# Altium PCB BugBuster_DAQ.PcbDoc (part 2 of 5)
Units mm, origin at the board's own origin, x right, y up, seen from the top; angles counter-clockwise.
Board outline 110 x 80 mm, 6 copper layers (Top Layer, Inner Layer 1, Inner Layer 2, Inner Layer 3, Inner Layer 4, Bottom Layer), stack 1.202 mm thick; 245 components, 205 nets, 1250 pads, 1565 vias.
Unrouted connection lines stored in the file: 8.
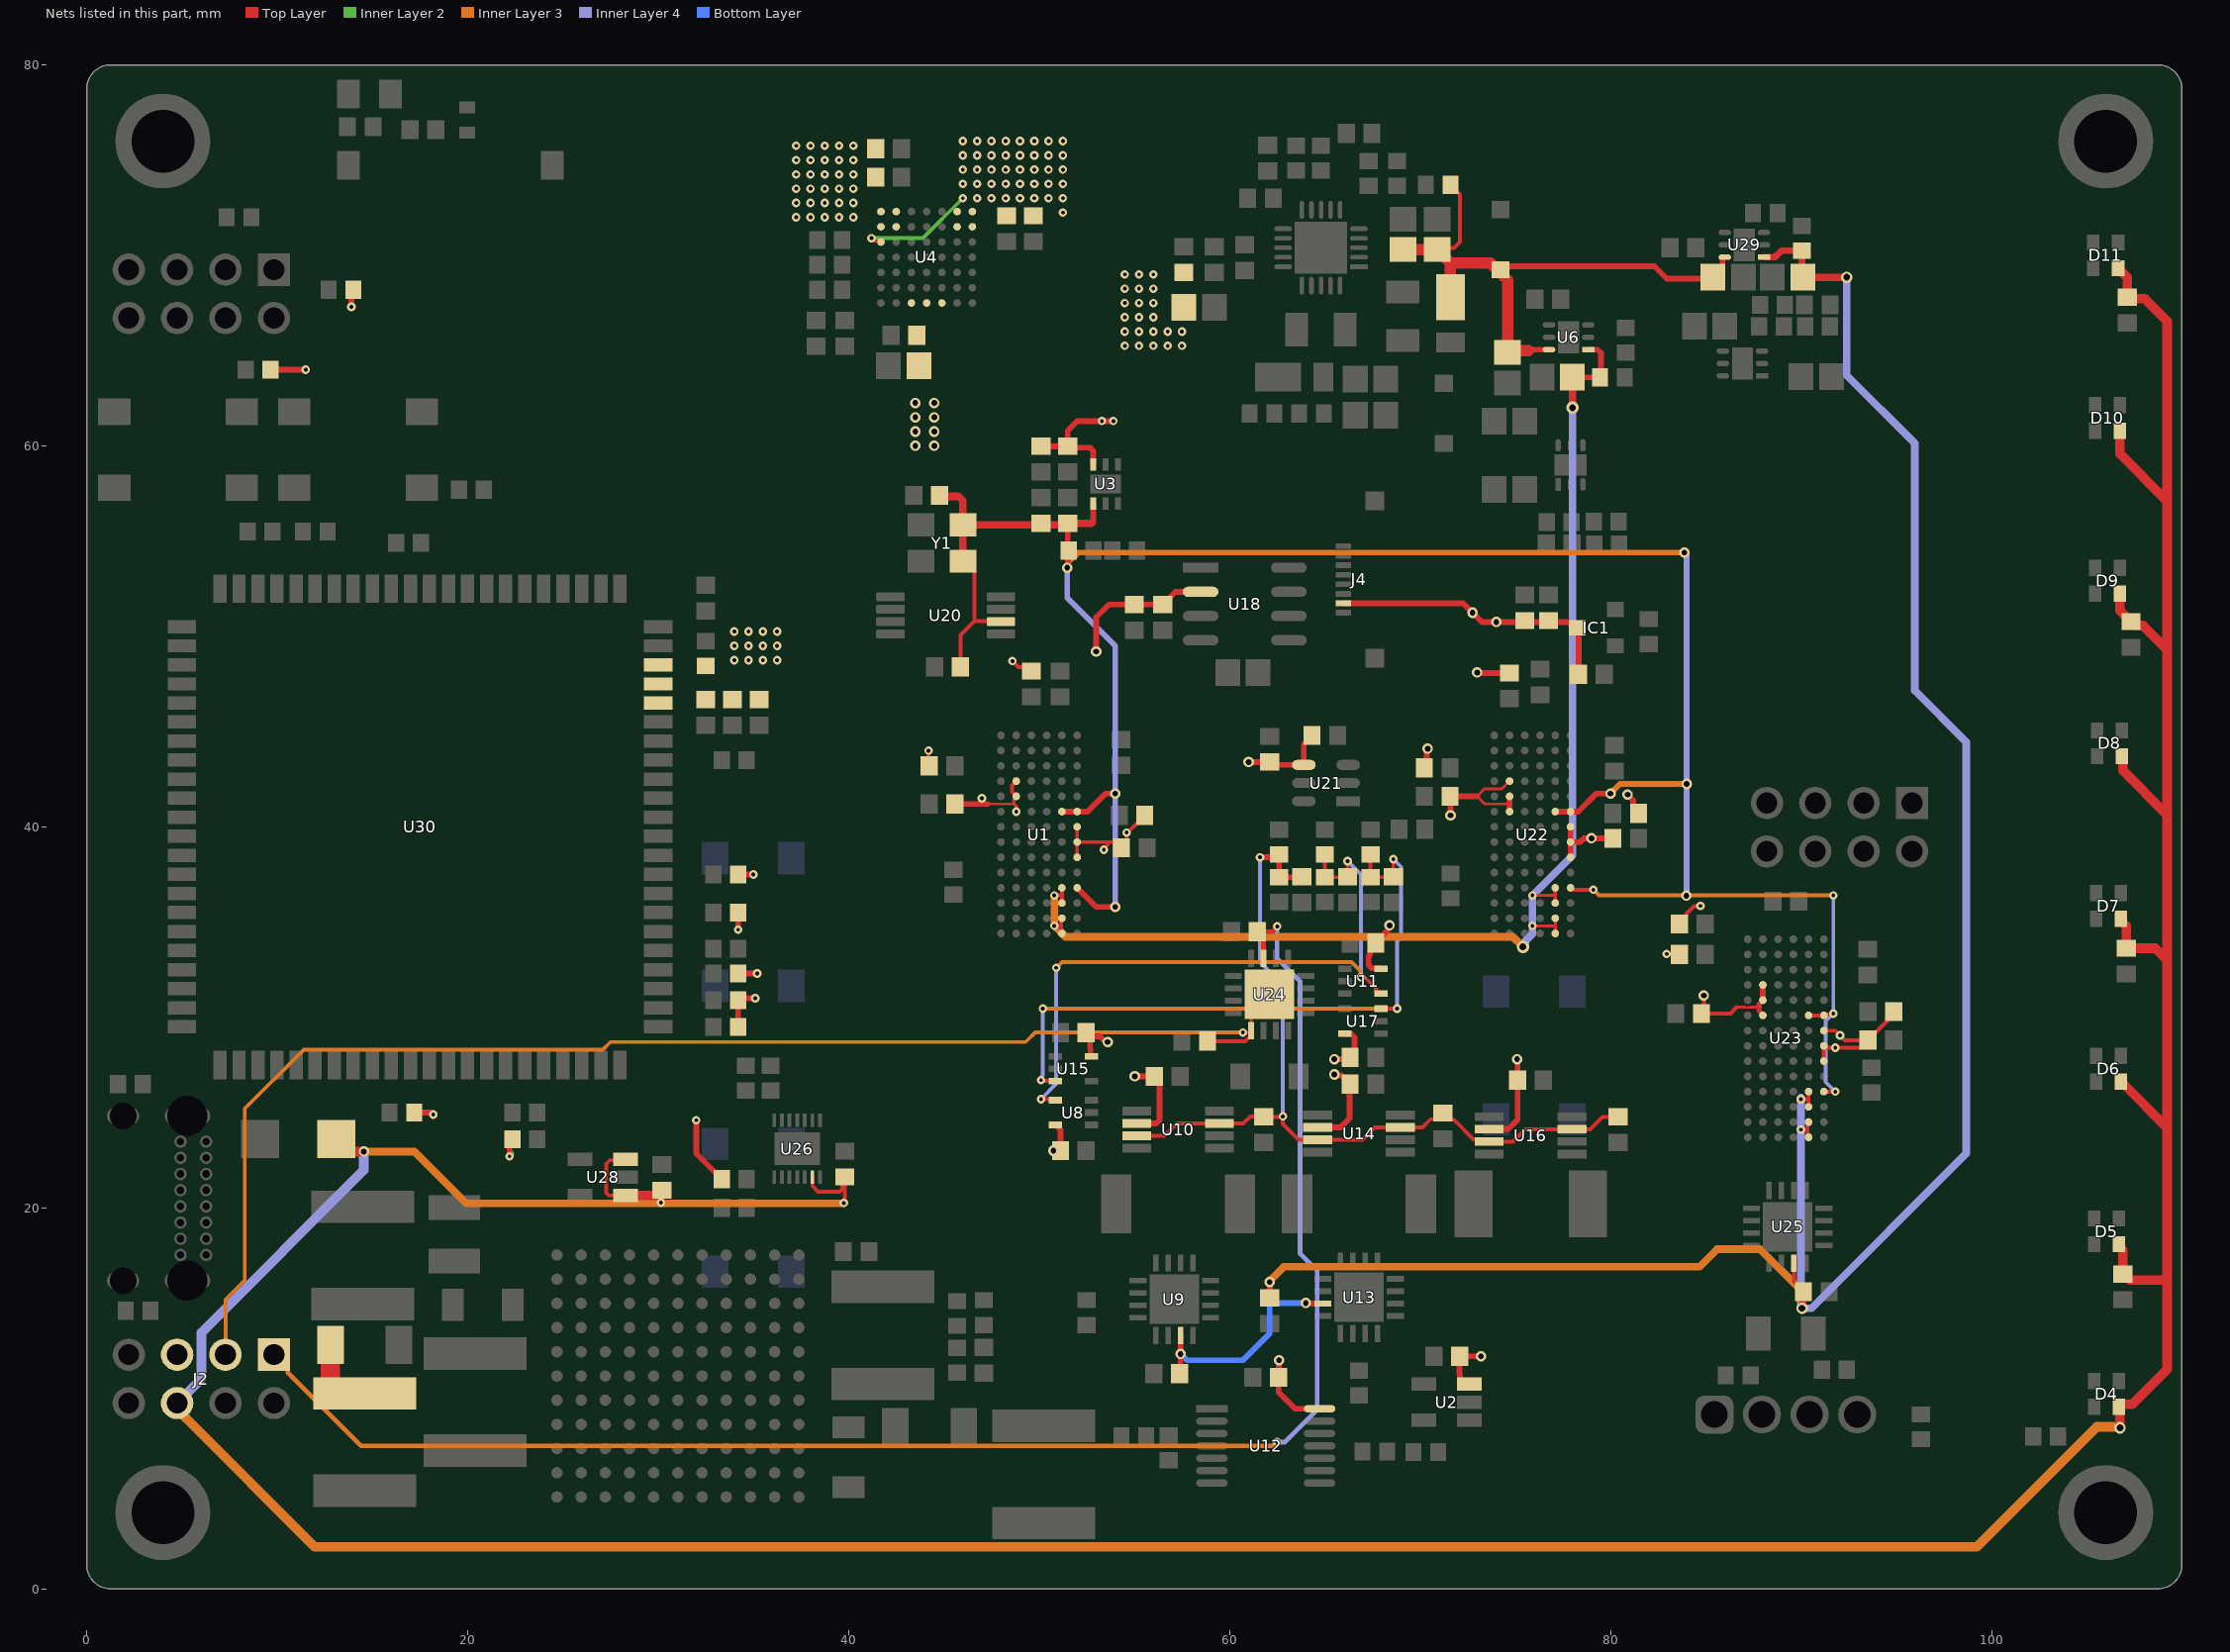
[diagram p6: the nets of this part, all layers, seen from the top]

## Part data (continued)
C47 C94: library part GCJ188R71E102KA01D, "CAP CER 1000PF 25V X7R 0603", Device Package="0603 (1608 Metric)", manufacturer="Murata Electronics", Operating Temperature="-55°C ~ 125°C", Ratings=AEC-Q200, Supplier Part Number 1=490-16478-1-ND, Temperature Coefficient=X7R, Tolerance=±10%, Voltage - Rated=25V, Applications="Automotive Boardflex Sensitive", Capacitance="1000 pF", componentlink1description=Datasheet, componentlink1url=https://search.murata.co.jp/Ceramy/image/img/A01X/G101/ENG/GCJ188R71E102KA01-01.pdf, componentlink2description="DigiKey Link", componentlink2url=https://www.digikey.com/en/products/detail/murata-electronics/GCJ188R71E102KA01D/7363222, Features="Soft Termination", lastupdated="2026-04-06 19:23:52.667000", Lifecycle Status=Active, Minimum Order=1, Mounting Type="Surface Mount MLCC", Package / Case="0603 (1608 Metric)", packaging=TapeAndReel, Part Number=GCJ188R71E102KA01D, Part Status=Active, partid=2177, price=0.01, series=GCJ, Size / Dimension="0.063\ L x 0.031\ W (1.60mm x 0.80mm)", Supplier 1=DigiKey, Thickness (Max)="0.035\ (0.90mm)"
C65 C66 C67 C69 C70: library part CGA9P3X7R1H226M250KB, "CAP 2220 X7R 50V 22UF 20% 2.50MM", Device Package="2220 (5750 Metric)", manufacturer="TDK Corporation", Operating Temperature="-55°C ~ 125°C", Ratings=AEC-Q200, Supplier Part Number 1=445-181650-1-ND, Temperature Coefficient=X7R, Tolerance=±20%, Voltage - Rated=50V, Applications=Automotive, Capacitance=22µF, componentlink1description=Datasheet, componentlink1url=https://product.tdk.com/info/en/catalog/datasheets/mlcc_automotive_general_en.pdf?ref_disty=digikey, componentlink2description="DigiKey Link", componentlink2url=http://digikey.com/product-detail/en/tdk-corporation/CGA9P3X7R1H226M250KB/445-181650-1-ND/10240637, Features="Low ESL", lastupdated="2020-09-02 01:11:23.223000", Lifecycle Status=Active, Minimum Order=1, Mounting Type="Surface Mount MLCC", Package / Case="2220 (5750 Metric)", packaging=TapeAndReel, Part Number=CGA9P3X7R1H226M250KB, Part Status=Active, price=5.78, series=CGA, Size / Dimension="0.224\ L x 0.197\ W (5.70mm x 5.00mm)", Supplier 1=DigiKey, Thickness (Max)="0.110\ (2.80mm)"
C68: library part 1210B106K500CT, "CAP CER 10UF 50V X7R 1210", Device Package="1210 (3225 Metric)", manufacturer="Walsin Technology Corporation", Operating Temperature="-55°C ~ 125°C", Supplier Part Number 1=1292-1210B106K500CT-ND, Temperature Coefficient=X7R, Tolerance=±10%, Voltage - Rated=50V, Applications="General Purpose", Capacitance="10 µF", componentlink1description=Datasheet, componentlink1url=https://www.passivecomponent.com/wp-content/uploads/datasheet/WTC_MLCC_General_Purpose.pdf, componentlink2description="DigiKey Link", componentlink2url=https://www.digikey.com/en/products/detail/walsin-technology-corporation/1210B106K500CT/15987744, lastupdated="2026-04-06 19:45:06.543000", Lifecycle Status=Active, Minimum Order=1, Mounting Type="Surface Mount MLCC", Package / Case="1210 (3225 Metric)", packaging=TapeAndReel, Part Number=1210B106K500CT, partid=78364, price=0.07, series=-, Size / Dimension="0.126\ L x 0.098\ W (3.20mm x 2.50mm)", Supplier 1=DigiKey, Thickness (Max)="0.110\ (2.80mm)"
C71: library part CC0603KRNPO9BN470, "CAP CER 47PF 50V C0G/NPO 0603", Device Package="0603 (1608 Metric)", manufacturer=Yageo, Operating Temperature="-55°C ~ 125°C", Supplier Part Number 1=311-4037-1-ND, Temperature Coefficient="C0G NP0", Tolerance=±10%, Voltage - Rated=50V, Applications="General Purpose", Capacitance="47 pF", componentlink1description=Datasheet, componentlink1url=https://www.yageo.com/upload/media/product/productsearch/datasheet/mlcc/UPY-GP_NP0_16V-to-50V_17.pdf, componentlink2description="DigiKey Link", componentlink2url=https://www.digikey.com/en/products/detail/yageo/CC0603KRNPO9BN470/5883714, lastupdated="2026-04-06 19:23:26.303000", Lifecycle Status=Active, Minimum Order=1, Mounting Type="Surface Mount MLCC", Package / Case="0603 (1608 Metric)", packaging=TapeAndReel, Part Number=CC0603KRNPO9BN470, Part Status=Active, partid=9442, price=0.01, series=CC, Size / Dimension="0.063\ L x 0.031\ W (1.60mm x 0.80mm)", Supplier 1=DigiKey, Thickness (Max)="0.035\ (0.90mm)"
C73: library part GRM21BZ7YA475KE15K, "CAP CER 4.7UF 35V X7R 0805", Device Package="0805 (2012 Metric)", manufacturer="Murata Electronics", Operating Temperature="-55°C ~ 125°C", Supplier Part Number 1=490-GRM21BZ7YA475KE15KCT-ND, Temperature Coefficient=X7R, Tolerance=±10%, Voltage - Rated=35V, Applications="General Purpose", Capacitance="4.7 µF", componentlink1description=Datasheet, componentlink1url=https://search.murata.co.jp/Ceramy/image/img/A01X/G101/ENG/GRM21BZ7YA475KE15-01.pdf, componentlink2description="DigiKey Link", componentlink2url=https://www.digikey.com/en/products/detail/murata-electronics/GRM21BZ7YA475KE15K/13904872, lastupdated="2026-04-06 19:31:47.907000", Lifecycle Status=Active, Minimum Order=1, Mounting Type="Surface Mount MLCC", Package / Case="0805 (2012 Metric)", packaging=TapeAndReel, Part Number=GRM21BZ7YA475KE15K, Part Status=Active, partid=42428, price=0.05, series=GRM, Size / Dimension="0.079\ L x 0.049\ W (2.00mm x 1.25mm)", Supplier 1=DigiKey, Thickness (Max)="0.057\ (1.45mm)"
C77 C78: library part AC0603KRX7R0BB103, "CAP CER 10000PF 100V X7R 0603", Device Package="0603 (1608 Metric)", manufacturer=Yageo, Operating Temperature="-55°C ~ 125°C", Ratings=AEC-Q200, Supplier Part Number 1=311-3100-1-ND, Temperature Coefficient=X7R, Tolerance=±10%, Voltage - Rated=100V, Applications=Automotive, Capacitance="10000 pF", componentlink1description=Datasheet, componentlink1url=http://www.yageo.com/NewPortal/_en/search/productDocs.jsp?YageoPartNumber=AC0603KRX7R0BB103, componentlink2description="DigiKey Link", componentlink2url=https://www.digikey.com/en/products/detail/yageo/AC0603KRX7R0BB103/6643086, lastupdated="2026-04-06 19:23:52.473000", Lifecycle Status=Active, Minimum Order=1, Mounting Type="Surface Mount MLCC", Package / Case="0603 (1608 Metric)", packaging=TapeAndReel, Part Number=AC0603KRX7R0BB103, Part Status=Active, partid=2218, price=0.01, series=AC, Size / Dimension="0.063\ L x 0.031\ W (1.60mm x 0.80mm)", Supplier 1=DigiKey, Thickness (Max)="0.035\ (0.90mm)"
C85: library part 06035C4R7KAT2A, "SMT Capacitor", Device Package="0603 (1608 Metric)", manufacturer="KYOCERA AVX", Operating Temperature="-55°C ~ 125°C", Supplier Part Number 1=478-06035C4R7KAT2ACT-ND, Temperature Coefficient=X7R, Tolerance=±10%, Voltage - Rated=50V, Applications="General Purpose", Capacitance="4.7 pF", componentlink2description="DigiKey Link", componentlink2url=https://www.digikey.com/en/products/detail/kyocera-avx/06035C4R7KAT2A/11259106, lastupdated="06/04/2026 19:18:45", Lifecycle Status=Active, Minimum Order=1, Mounting Type="Surface Mount, MLCC", Package / Case="0603 (1608 Metric)", packaging=TapeAndReel, Part Number=06035C4R7KAT2A, partid=68839, price=0.03, series=-, Size / Dimension="0.063\" L x 0.032\" W (1.60mm x 0.81mm)", Supplier 1=DigiKey, Thickness (Max)="0.035\" (0.90mm)"
C86: library part C0603C279D5GAC7867, "SMT Capacitor", Device Package="0603 (1608 Metric)", manufacturer=KEMET, Operating Temperature="-55°C ~ 125°C", Supplier Part Number 1=399-C0603C279D5GAC7867CT-ND, Temperature Coefficient="C0G, NP0", Tolerance=±0.5pF, Voltage - Rated=50V, Applications="General Purpose", Capacitance="2.7 pF", componentlink1description=Datasheet, componentlink1url=https://api.kemet.com/component-edge/download/datasheet/C0603C279D5GACTU.pdf, componentlink2description="DigiKey Link", componentlink2url=https://www.digikey.com/en/products/detail/kemet/C0603C279D5GAC7867/2200451, Features="Low ESL", lastupdated="06/04/2026 19:22:23", Lifecycle Status=Active, Minimum Order=1, Mounting Type="Surface Mount, MLCC", Package / Case="0603 (1608 Metric)", packaging=TapeAndReel, Part Number=C0603C279D5GAC7867, Part Status=Active, partid=34968, price=0.04, series="SMD Comm C0G", Size / Dimension="0.063\" L x 0.031\" W (1.60mm x 0.80mm)", Supplier 1=DigiKey, Thickness (Max)="0.034\" (0.87mm)"
CR1: "DIODE STANDARD 1000V 1A SOD123F", Manufacturer_Name="Diodes Inc", Copyright="Copyright (C) 2026 Ultra Librarian. All rights reserved.", Manufacturer_Part_Number=RS1MWF-7
D1 D2: library part CMP-12790-000037-1, "DIODE SCHOTTKY 40V 2A POWERDI123", Capacitance=28pF, Forward Current=2A, manufacturer="Diodes Inc.", Max Junction Temp=+125°C, Max Repetitive Reverse Voltage=40V, Max Surge Forward Current=40A, Package=PowerDI123, Peak Reverse Current=20uA, Temperature="-65°C to +125°C", Temperature Range Low=-65°C, Automotive=No, Category=Diode, componentlink2description=Datasheet, componentlink2url=https://www.diodes.com/assets/Package-Files/PowerDI123.pdf, Device Class L1="Discrete Semiconductors", Device Class L2=Diodes, Device Class L3="Schottky Diodes", Digikey Description="DIODE SCHOTTKY 40V 2A POWERDI123", Footprint Url=https://www.diodes.com/assets/Package-Files/PowerDI123.pdf, Height=1mm, Lead Free=Yes, Manufacturer Part Number=DFLS240-7, Mouser Description="Schottky Diodes & Rectifiers 2.0A 40V", Octopart=https://octopart.com/dfls240-7-diodes+inc.-9289682, Reverse Voltage=40V, RoHS=TRUE, Temperature Range High=+125°C
D3: library part CMP-1055-00307-2, "DIODE SCHOTTKY 40V 3A SMA", Average Rectified Current=3A, Case/Package=SMA, Forward Voltage=450mV, Max Forward Surge Current (Ifsm)=100A, Max Operating Temperature=150°C, Max Repetitive Reverse Voltage (Vrrm)=40V, Max Reverse Current=15mA, Min Operating Temperature=-55°C, Package Quantity=5000, Element Configuration=Single, Forward Current=3A, Halogen Free="Halogen Free", Height=2.05mm, Lead Free="Lead Free", Length=4.57mm, Max Reverse Voltage (DC)=40V, Number of Pins=2, packaging="Tape and Reel", Peak Non-Repetitive Surge Current=100A, Radiation Hardening=No, REACH SVHC="No SVHC", RoHS Compliant=Yes, series=-, Weight=0.003739oz, Width=2.92mm
D4 D5 D6 D7 D8 D9 D10 D11: "2020 RGB LED(BUILT-IN IC)", Package=None, Check_prices=https://www.snapeda.com/parts/XL-2020RGBC-WS2812B/Xinglight/view-part/?ref=eda, MF=XINGLIGHT, MP=XL-2020RGBC-WS2812B, SnapEDA_Link=https://www.snapeda.com/parts/XL-2020RGBC-WS2812B/Xinglight/view-part/?ref=snap
D12 D13: "DIODE ZENER 27V 500MW SOD123", Current - Reverse Leakage @ Vr="100 nA @ 18.9 V", manufacturer="Diodes Incorporated", Operating Temperature="-65°C ~ 150°C", Package / Case=SOD-123, Power - Max="500 mW", Supplier Part Number 1=BZT52C27-FDICT-ND, Tolerance=±7%, Voltage - Forward (Vf) (Max) @ If="900 mV @ 10 mA", Voltage - Zener (Nom) (Vz)="27 V", componentlink1description=Datasheet, componentlink1url=https://www.diodes.com/assets/Datasheets/ds18004.pdf, componentlink2description="DigiKey Link", componentlink2url=https://www.digikey.com/en/products/detail/diodes-incorporated/BZT52C27-7-F/815014, Impedance (Max) (Zzt)="80 Ohms", lastupdated="05/04/2026 20:32:36", Lifecycle Status=Active, Minimum Order=1, Mounting Type="Surface Mount", packaging=TapeAndReel, Part Number=BZT52C27-7-F, Part Status=Active, partid=1914, price=0.02, series=-, Supplier 1=DigiKey, Supplier Device Package=SOD-123
DNP R2 R3 R4 R20 R22 R41 R51 R65 R67: library part ERJ-PA3F1003V, "RES SMD 100K OHM 1% 1/3W 0603", Device Package="0603 (1608 Metric)", manufacturer="Panasonic Electronic Components", Operating Temperature="-55Â°C ~ 155Â°C", Power (Watts)="0.333W 1/3W", Ratings=AEC-Q200, Supplier Device Package=0603, Supplier Part Number 1=P100KBYCT-ND, Temperature Coefficient=Â±100ppm/Â°C, Tolerance=Â±1%, componentlink1description=Datasheet, componentlink1url=https://industrial.panasonic.com/cdbs/www-data/pdf/RDO0000/AOA0000C331.pdf, componentlink2description="DigiKey Link", componentlink2url=https://www.digikey.com/en/products/detail/panasonic-electronic-components/ERJ-PA3F1003V/5035850, Composition="Thick Film", Features="Automotive AEC-Q200 Pulse Withstanding", Height - Seated (Max)="0.022\ (0.55mm)", lastupdated="2024-02-09 20:42:57.243000", Lifecycle Status=Active, Minimum Order=1, Number of Terminations=2, Package / Case="0603 (1608 Metric)", packaging=TapeAndReel, Part Number=ERJ-PA3F1003V, Part Status=Active, partid=14879, price=0.01, Resistance="100 kOhms", series=ERJ-PA3, Size / Dimension="0.063\ L x 0.031\ W (1.60mm x 0.80mm)", Supplier 1=DigiKey
E1: "2.4GHz Bluetooth, WirelessHART, WLAN, Zigbeeâ„¢ Stamped Metal RF Antenna 2.4GHz ~ 2.5GHz - Solder Surface Mount", Package=None, Check_prices=https://www.snapeda.com/parts/PRO-OB-440/Abracon/view-part/?ref=eda, MF=Abracon, MP=PRO-OB-440, SnapEDA_Link=https://www.snapeda.com/parts/PRO-OB-440/Abracon/view-part/?ref=snap
FB1 FB2 FB3 FB5 FB6 FB7 FB8 FB9 FB10: library part WLBD1608HCU102TH, "FERRITE BEAD 1000 OHM 0603 1LN", Current Rating (Max)=1.3A, DC Resistance (DCR) (Max)=150mOhm, Device Package="0603 (1608 Metric)", manufacturer="Walsin Technology Corporation", Operating Temperature="-55°C ~ 125°C", Supplier Part Number 1=1292-WLBD1608HCU102THCT-ND, componentlink1description=Datasheet, componentlink1url=https://www.passivecomponent.com/wp-content/uploads/inductor/WLBD1005-4532_HC_Series.pdf, componentlink2description="DigiKey Link", componentlink2url=https://www.digikey.com/en/products/detail/walsin-technology-corporation/WLBD1608HCU102TH/14563787, Height (Max)="0.026\" (0.65mm)", Impedance @ Frequency="1000 Ohms @ 100 MHz", lastupdated="05/04/2026 20:27:58", Lifecycle Status=Active, Minimum Order=1, Mounting Type="Surface Mount", Number of Lines=1, Package / Case="0603 (1608 Metric)", packaging=TapeAndReel, Part Number=WLBD1608HCU102TH, Part Status=Active, partid=2833, price=0.01, series=-, Size / Dimension="0.047\" L x 0.025\" W (1.19mm x 0.64mm)", Supplier 1=DigiKey
FB4: library part BBPY00201209601Y00, "EMI BEAD FILETER", Current Rating (Max)=2A, DC Resistance (DCR) (Max)=100mOhm, Device Package="0805 (2012 Metric)", manufacturer="Chilisin Electronics", Operating Temperature="-55°C ~ 125°C", Supplier Part Number 1=2184-BBPY00201209601Y00CT-ND, componentlink1description=Datasheet, componentlink1url=https://www.chilisin.com/upload/media/product/emi_bead/file/BBPY_Series.pdf, componentlink2description="DigiKey Link", componentlink2url=http://digikey.com/product-detail/en/chilisin-electronics/BBPY00201209601Y00/2184-BBPY00201209601Y00CT-ND/10498864, Impedance @ Frequency="600 Ohms @ 100MHz", lastupdated="05/04/2026 20:28:59", Lifecycle Status=Active, Minimum Order=1, Mounting Type="Surface Mount", Number of Lines=1, Package / Case="0805 (2012 Metric)", packaging=Unknown, Part Number=BBPY00201209601Y00, Part Status=Active, partid=1846, price=0.02, Supplier 1=DigiKey
FB11 FB12: library part BLM31KN471SN1L, "FERRITE BEAD 470 OHM 1206 1LN", Current Rating (Max)=4A, DC Resistance (DCR) (Max)=20mOhm, Device Package="1206 (3216 Metric)", manufacturer="Murata Electronics", Operating Temperature="-55°C ~ 125°C", Supplier Part Number 1=490-16530-1-ND, componentlink1description=Datasheet, componentlink1url=https://www.murata.com/en-global/products/productdata/8796739698718/ENFA0006.pdf, componentlink2description="DigiKey Link", componentlink2url=https://www.digikey.com/en/products/detail/murata-electronics/BLM31KN471SN1L/7564095, Filter Type="Power Line", Height (Max)="0.071\" (1.80mm)", Impedance @ Frequency="470 Ohms @ 100 MHz", lastupdated="05/04/2026 20:29:27", Lifecycle Status=Active, Minimum Order=1, Mounting Type="Surface Mount", Number of Lines=1, Package / Case="1206 (3216 Metric)", packaging=TapeAndReel, Part Number=BLM31KN471SN1L, Part Status=Active, partid=1689, price=0.10, series=BLM, Size / Dimension="0.126\" L x 0.063\" W (3.20mm x 1.60mm)", Supplier 1=DigiKey
IC1: library part AP7313-15SRG-7, "IC REG LINEAR LED DRIVER 60mA", Current - Output=60mA, Current - Quiescent (Iq)="75 µA", Current - Supply (Max)="85 µA", manufacturer="Diodes Incorporated", Operating Temperature="-40°C ~ 85°C", Supplier Device Package=SOT23R, Supplier Part Number 1=31-AP7313-15SRG-7CT-ND, Voltage - Input (Max)=6V, Voltage - Output (Min/Fixed)=1.5V, componentlink1description=Datasheet, componentlink1url=https://www.diodes.com/assets/Datasheets/AP7313.pdf, componentlink2description="DigiKey Link", componentlink2url=https://www.digikey.com/en/products/detail/diodes-incorporated/AP7313-15SRG-7/4249709, lastupdated="05/04/2026 20:53:04", Lifecycle Status=Active, Minimum Order=1, Mounting Type="Surface Mount", Number of Regulators=1, Output Configuration=Positive, Output Type=Fixed, packaging=TapeAndReel, Part Number="Taken From Chinese PCB", price=0.09, Protection Features="Over Current, Over Temperature, Short Circuit", PSRR="65dB (100Hz)", series=-, Supplier 1=DigiKey
J1: library part CMP-196119-000001-2, "CONN RCPT USB2.0 TYPE C 24POS RA", Contact Material="Copper Alloy", Contact Plating=Gold, Gender=Receptacle, Number of Positions=16, Orientation="Right Angle", USB Standard="USB 2.0"
J2 J3 J5: library part CMP-77940-000004-1, "PIN HEADER, THR, DUAL ROW, .100\""
J4: "0.5 mm Pitch Easy-On(TM) Type FPC Connector, 2.0 mm Mated Height, Right Angle, ZIF, SMT, Top Contact, 8 Circuits, -20 to 85 degC, ELV and RoHS Compliant, Tape and Reel", Current (Max per Contact)=0.5A, manufacturer=Molex, Voltage (Max)=50V, Circuits (Loaded)=8, componentlink1description="Manufacturer URL", componentlink1url=http://www.molex.com/molex/index.jsp, componentlink2description=Datasheet, componentlink2url=http://www.molex.com/webdocs/datasheets/pdf/en-us/0527450897_FFC_FPC_CONNECTORS.pdf, ComponentLink3Description="Package Specification", ComponentLink3URL=http://www.molex.com/pdm_docs/sd/527450897_sd.pdf, Contact Position=Top, Durability (mating cycles max)=20, Entry Angle="90degrees Angle", Mated Height=2.00mm, Material - Metal="Phosphor Bronze", Material - Plating Mating=Gold, Material - Plating Termination=Gold, Mounting Technology="Surface Mount", Number of Rows=1, Orientation="Right Angle", PackageDescription="8-Lead FPC Connector, Pitch 0.5 mm", PackageReference=52745-0897, PackageVersion="Rev. C, 07/2010", Packing="Tape and Reel", PartNumber=52745-0897, PCB Locator=No, PCB Retention=Yes, Pitch - Mating Interface=0.50mm, Polarized to PCB=Yes, RoHS=TRUE, Stackable=No
L1: library part DFE252010F-100M=P2, "FIXED IND 10UH 900MA 600 MOHM", Current - Saturation=1.5A, Current Rating (Amps)=900mA, DC Resistance (DCR)="600mOhm Max", Device Package="1008 (2520 Metric)", Inductance Frequency - Test=1MHz, manufacturer="Murata Electronics", Operating Temperature="-40°C ~ 125°C", Part Number=DFE252010F-100M=P2, Supplier Part Number 1=490-13039-1-ND, Tolerance=±20%, componentlink1description=Datasheet, componentlink1url=https://search.murata.co.jp/Ceramy/image/img/P02/J(E)TE243A-0012_DFE252010F_reference.pdf, componentlink2description="DigiKey Link", componentlink2url=http://digikey.com/product-detail/en/murata-electronics/DFE252010F-100M=P2/490-13039-1-ND/5812751, Height - Seated (Max)="0.039\" (1.00mm)", Inductance=10µH, lastupdated="02/09/2020 01:29:31", Lifecycle Status=Active, Material - Core="Iron Powder", Minimum Order=1, Mounting Type="Surface Mount", Package / Case="1008 (2520 Metric)", packaging=TapeAndReel, Part Status=Active, partid=3494, price=0.23, series=DFE252010F, Shielding=Shielded, Size / Dimension="0.098\" L x 0.079\" W (2.50mm x 2.00mm)", Supplier 1=DigiKey
L2: library part LPWI252010S4R7T, "FIXED IND 4.7UH 1.5A 245MOHM SMD", Current - Saturation=1.6A, Current Rating (Amps)=1.5A, DC Resistance (DCR)="245mOhm Max", Device Package="1008 (2520 Metric)", Inductance Frequency - Test=1MHz, manufacturer="Littelfuse Inc.", Operating Temperature="-40°C ~ 125°C", Supplier Device Package=1008, Supplier Part Number 1=F12114CT-ND, Tolerance=±20%, componentlink1description=Datasheet, componentlink1url=//media.digikey.com/pdf/Data%20Sheets/Littelfuse%20PDFs/LPWI_Series_Rev2019_Prelim.pdf, componentlink2description="DigiKey Link", componentlink2url=http://digikey.com/product-detail/en/littelfuse-inc/LPWI252010S4R7T/F12114CT-ND/9996689, Height - Seated (Max)="0.039\" (1.00mm)", Inductance=4.7µH, lastupdated="05/04/2026 21:02:38", Lifecycle Status=Active, Material - Core="Metal Composite", Minimum Order=1, Mounting Type="Surface Mount", Package / Case="1008 (2520 Metric)", packaging=TapeAndReel, Part Number=LPWI252010S4R7T, Part Status=Active, partid=3510, price=0.30, series=LPWI, Shielding=Shielded, Size / Dimension="0.098\" L x 0.079\" W (2.50mm x 2.00mm)", Supplier 1=DigiKey, Type="Thin Film"
L3: library part LQW18AS1N6J0ZD, "FIXED IND 1.6NH 700MA 30MOHM SMD", Current Rating (Amps)="700 mA", DC Resistance (DCR)="30mOhm Max", Device Package="0603 (1608 Metric)", Frequency - Self Resonant=12.5GHz, Inductance Frequency - Test="250 MHz", manufacturer="Murata Electronics", Operating Temperature="-55°C ~ 125°C", Q @ Freq="24 @ 250MHz", Ratings=AEC-Q200, Supplier Part Number 1=490-15806-1-ND, Tolerance=±5%, componentlink1description=Datasheet, componentlink1url=https://search.murata.co.jp/Ceramy/image/img/P02/JELF243A-9139.pdf, componentlink2description="DigiKey Link", componentlink2url=https://www.digikey.com/en/products/detail/murata-electronics/LQW18AS1N6J0ZD/6799231, Height - Seated (Max)="0.039\" (1.00mm)", Inductance="1.6 nH", lastupdated="05/04/2026 21:06:49", Lifecycle Status=Active, Material - Core=Non-Magnetic, Minimum Order=1, Mounting Type="Surface Mount", Package / Case="0603 (1608 Metric)", packaging=TapeAndReel, Part Number=LQW18AS1N6J0ZD, Part Status=Active, partid=873, price=0.05, series=LQW18, Shielding=Unshielded, Size / Dimension="0.063\" L x 0.031\" W (1.60mm x 0.80mm)", Supplier 1=DigiKey, Supplier Device Package="0603 (1608 Metric)", Type=Wirewound
P1: library part CMP-1502-01745-3, "Terminal Block, R/A Header, 4Pos, Th Rohs Compliant: Yes", Color=Green, Current=12A, Max Operating Temperature=105°C, Min Operating Temperature=-40°C, Voltage=300V, Contact Plating=Tin, Gender=Male, Lead Pitch=2.5mm, Mount="Through Hole", Number of Levels=1, Number of Pins=4, Number of Positions=4, Number of Positions Per Level=4, packaging=Box, Pitch=2.4892mm, RoHS=Compliant, Termination=Solder
R1 R40 R47 R54 R70: library part WSL060300000ZEA9, "RES 0 OHM JUMPER 0603", Device Package="0603 (1608 Metric)", manufacturer="Vishay Dale", Operating Temperature="-65°C ~ 170°C", Supplier Device Package=0603, Supplier Part Number 1=541-3927-1-ND, Temperature Coefficient=±3900ppm/°C, Tolerance=Jumper, componentlink1description=Datasheet, componentlink1url=http://www.vishay.com/docs/30192/wsl-9.pdf, componentlink2description="DigiKey Link", componentlink2url=https://www.digikey.com/en/products/detail/vishay-dale/WSL060300000ZEA9/7423217, Composition="Metal Element", Height - Seated (Max)="0.021\" (0.53mm)", lastupdated="09/02/2024 20:43:09", Lifecycle Status=Active, Minimum Order=1, Number of Terminations=2, Package / Case="0603 (1608 Metric)", packaging=TapeAndReel, Part Number=WSL060300000ZEA9, Part Status=Active, partid=11865, price=0.39, Resistance="0 Ohms", series=WSL, Size / Dimension="0.060\" L x 0.030\" W (1.52mm x 0.76mm)", Supplier 1=DigiKey
R5 R6: library part CRCW06031K69FKEAC, "RES 1.69K OHM 1% 1/10W 0603", Device Package="0603 (1608 Metric)", manufacturer="Vishay Dale", Operating Temperature="-55°C ~ 155°C", Power (Watts)="0.1W, 1/10W", Supplier Device Package=0603, Supplier Part Number 1=541-5240-1-ND, Temperature Coefficient=±100ppm/°C, Tolerance=±1%, componentlink1description=Datasheet, componentlink1url=https://www.vishay.com/docs/28773/crcwce3.pdf, componentlink2description="DigiKey Link", componentlink2url=https://www.digikey.com/en/products/detail/vishay-dale/CRCW06031K69FKEAC/7924250, Composition="Thick Film", Height - Seated (Max)="0.022\" (0.55mm)", lastupdated="09/02/2024 20:41:16", Lifecycle Status=Active, Minimum Order=1, Number of Terminations=2, Package / Case="0603 (1608 Metric)", packaging=TapeAndReel, Part Number=CRCW06031K69FKEAC, Part Status=Active, partid=65693, price=0.01, Resistance="1.69 kOhms", series=CRCW-C, Size / Dimension="0.063\" L x 0.031\" W (1.60mm x 0.80mm)", Supplier 1=DigiKey
R7: library part ERJ-3EKF3482V, "RES SMD 34.8K OHM 1% 1/10W 0603", Device Package="0603 (1608 Metric)", manufacturer="Panasonic Electronic Components", Operating Temperature="-55°C ~ 155°C", Power (Watts)="0.1W, 1/10W", Ratings=AEC-Q200, Supplier Device Package=0603, Supplier Part Number 1=P34.8KHCT-ND, Temperature Coefficient=±100ppm/°C, Tolerance=±1%, componentlink1description=Datasheet, componentlink1url=https://industrial.panasonic.com/cdbs/www-data/pdf/RDA0000/AOA0000C304.pdf, componentlink2description="DigiKey Link", componentlink2url=https://www.digikey.com/en/products/detail/panasonic-electronic-components/ERJ-3EKF3482V/196306, Composition="Thick Film", Features="Automotive AEC-Q200", Height - Seated (Max)="0.022\" (0.55mm)", lastupdated="09/02/2024 20:42:15", Lifecycle Status=Active, Minimum Order=1, Number of Terminations=2, Package / Case="0603 (1608 Metric)", packaging=CutTape, Part Number=ERJ-3EKF3482V, Part Status=Active, partid=24039, price=0.01, Resistance="34.8 kOhms", series=ERJ-3EK, Size / Dimension="0.063\" L x 0.031\" W (1.60mm x 0.80mm)", Supplier 1=DigiKey
R8: library part ERJ-3EKF6981V, "RES SMD 6.98K OHM 1% 1/10W 0603", Device Package="0603 (1608 Metric)", manufacturer="Panasonic Electronic Components", Operating Temperature="-55°C ~ 155°C", Power (Watts)="0.1W, 1/10W", Ratings=AEC-Q200, Supplier Device Package=0603, Supplier Part Number 1=P6.98KHCT-ND, Temperature Coefficient=±100ppm/°C, Tolerance=±1%, componentlink1description=Datasheet, componentlink1url=https://industrial.panasonic.com/cdbs/www-data/pdf/RDA0000/AOA0000C304.pdf, componentlink2description="DigiKey Link", componentlink2url=https://www.digikey.com/en/products/detail/panasonic-electronic-components/ERJ-3EKF6981V/196424, Composition="Thick Film", Features="Automotive AEC-Q200", Height - Seated (Max)="0.022\" (0.55mm)", lastupdated="09/02/2024 20:42:22", Lifecycle Status=Active, Minimum Order=1, Number of Terminations=2, Package / Case="0603 (1608 Metric)", packaging=TapeAndReel, Part Number=ERJ-3EKF6981V, Part Status=Active, partid=23131, price=0.01, Resistance="6.98 kOhms", series=ERJ-3EK, Size / Dimension="0.063\" L x 0.031\" W (1.60mm x 0.80mm)", Supplier 1=DigiKey
R9: library part ERJ-3EKF2202V, "RES SMD 22K OHM 1% 1/10W 0603", Device Package="0603 (1608 Metric)", manufacturer="Panasonic Electronic Components", Operating Temperature="-55°C ~ 155°C", Power (Watts)="0.1W 1/10W", Ratings=AEC-Q200, Supplier Device Package=0603, Supplier Part Number 1=P22.0KHCT-ND, Temperature Coefficient=±100ppm/°C, Tolerance=±1%, componentlink1description=Datasheet, componentlink1url=https://industrial.panasonic.com/cdbs/www-data/pdf/RDA0000/AOA0000C304.pdf, componentlink2description="DigiKey Link", componentlink2url=https://www.digikey.com/en/products/detail/panasonic-electronic-components/ERJ-3EKF2202V/1746336, Composition="Thick Film", Features="Automotive AEC-Q200", Height - Seated (Max)="0.022\ (0.55mm)", lastupdated="2024-02-09 20:42:23.103000", Lifecycle Status=Active, Minimum Order=1, Number of Terminations=2, Package / Case="0603 (1608 Metric)", packaging=TapeAndReel, Part Number=ERJ-3EKF2202V, Part Status=Active, partid=23051, price=0.01, Resistance="22 kOhms", series=ERJ-3EK, Size / Dimension="0.063\ L x 0.031\ W (1.60mm x 0.80mm)", Supplier 1=DigiKey
R10: library part ERJ-3EKF4422V, "RES SMD 44.2K OHM 1% 1/10W 0603", Device Package="0603 (1608 Metric)", manufacturer="Panasonic Electronic Components", Operating Temperature="-55°C ~ 155°C", Power (Watts)="0.1W 1/10W", Ratings=AEC-Q200, Supplier Device Package=0603, Supplier Part Number 1=P44.2KHCT-ND, Temperature Coefficient=±100ppm/°C, Tolerance=±1%, componentlink1description=Datasheet, componentlink1url=https://industrial.panasonic.com/cdbs/www-data/pdf/RDA0000/AOA0000C304.pdf, componentlink2description="DigiKey Link", componentlink2url=https://www.digikey.com/en/products/detail/panasonic-electronic-components/ERJ-3EKF4422V/196359, Composition="Thick Film", Features="Automotive AEC-Q200", Height - Seated (Max)="0.022\ (0.55mm)", lastupdated="2024-02-09 20:41:56.340000", Lifecycle Status=Active, Minimum Order=1, Number of Terminations=2, Package / Case="0603 (1608 Metric)", packaging=TapeAndReel, Part Number=ERJ-3EKF4422V, Part Status=Active, partid=26081, price=0.01, Resistance="44.2 kOhms", series=ERJ-3EK, Size / Dimension="0.063\ L x 0.031\ W (1.60mm x 0.80mm)", Supplier 1=DigiKey
R11: library part ERJ-3EKF7872V, "RES SMD 78.7K OHM 1% 1/10W 0603", Device Package="0603 (1608 Metric)", manufacturer="Panasonic Electronic Components", Operating Temperature="-55°C ~ 155°C", Power (Watts)="0.1W 1/10W", Ratings=AEC-Q200, Supplier Device Package=0603, Supplier Part Number 1=P78.7KHCT-ND, Temperature Coefficient=±100ppm/°C, Tolerance=±1%, componentlink1description=Datasheet, componentlink1url=https://industrial.panasonic.com/cdbs/www-data/pdf/RDA0000/AOA0000C304.pdf, componentlink2description="DigiKey Link", componentlink2url=https://www.digikey.com/en/products/detail/panasonic-electronic-components/ERJ-3EKF7872V/196479, Composition="Thick Film", Features="Automotive AEC-Q200", Height - Seated (Max)="0.022\ (0.55mm)", lastupdated="2024-02-09 20:41:56.970000", Lifecycle Status=Active, Minimum Order=1, Number of Terminations=2, Package / Case="0603 (1608 Metric)", packaging=TapeAndReel, Part Number=ERJ-3EKF7872V, Part Status=Active, partid=26003, price=0.01, Resistance="78.7 kOhms", series=ERJ-3EK, Size / Dimension="0.063\ L x 0.031\ W (1.60mm x 0.80mm)", Supplier 1=DigiKey
R12: library part RMCF0603FT3M16, "RES 3.16M OHM 1% 1/10W 0603", Device Package="0603 (1608 Metric)", manufacturer="Stackpole Electronics Inc", Operating Temperature="-55°C ~ 155°C", Power (Watts)="0.1W, 1/10W", Ratings=AEC-Q200, Supplier Device Package=0603, Supplier Part Number 1=RMCF0603FT3M16CT-ND, Temperature Coefficient=±200ppm/°C, Tolerance=±1%, componentlink1description=Datasheet, componentlink1url=https://www.seielect.com/catalog/sei-rmcf_rmcp.pdf, componentlink2description="DigiKey Link", componentlink2url=http://digikey.com/product-detail/en/stackpole-electronics-inc/RMCF0603FT3M16/RMCF0603FT3M16CT-ND/7790140, Composition="Thick Film", Features="Automotive AEC-Q200", Height - Seated (Max)="0.022\" (0.55mm)", lastupdated="09/02/2024 20:42:44", Lifecycle Status=Active, Minimum Order=1, Number of Terminations=2, Package / Case="0603 (1608 Metric)", packaging=CutTape, Part Number=RMCF0603FT3M16, Part Status=Active, partid=18356, price=0.10, Resistance="3.16 MOhms", series=RMCF, Size / Dimension="0.061\" L x 0.031\" W (1.55mm x 0.80mm)", Supplier 1=DigiKey
R13 R43 R44 R46 R62 R68 R69 R74 R76: library part ERJ-PA3F1002V, "RES SMD 10K OHM 1% 1/3W 0603", Device Package="0603 (1608 Metric)", manufacturer="Panasonic Electronic Components", Operating Temperature="-55Â°C ~ 155Â°C", Power (Watts)="0.333W 1/3W", Ratings=AEC-Q200, Supplier Device Package=0603, Supplier Part Number 1=P10KBYCT-ND, Temperature Coefficient=Â±100ppm/Â°C, Tolerance=Â±1%, componentlink1description=Datasheet, componentlink1url=https://industrial.panasonic.com/cdbs/www-data/pdf/RDO0000/AOA0000C331.pdf, componentlink2description="DigiKey Link", componentlink2url=https://www.digikey.com/en/products/detail/panasonic-electronic-components/ERJ-PA3F1002V/5035849, Composition="Thick Film", Features="Automotive AEC-Q200 Pulse Withstanding", Height - Seated (Max)="0.022\ (0.55mm)", lastupdated="2024-02-09 20:42:57.847000", Lifecycle Status=Active, Minimum Order=1, Number of Terminations=2, Package / Case="0603 (1608 Metric)", packaging=TapeAndReel, Part Number=ERJ-PA3F1002V, Part Status=Active, partid=14698, price=0.01, Resistance="10 kOhms", series=ERJ-PA3, Size / Dimension="0.063\ L x 0.031\ W (1.60mm x 0.80mm)", Supplier 1=DigiKey
R14: library part ERJ-3EKF5112V, "RES SMD 51.1K OHM 1% 1/10W 0603", Device Package="0603 (1608 Metric)", manufacturer="Panasonic Electronic Components", Operating Temperature="-55°C ~ 155°C", Power (Watts)="0.1W 1/10W", Ratings=AEC-Q200, Supplier Device Package=0603, Supplier Part Number 1=P51.1KHCT-ND, Temperature Coefficient=±100ppm/°C, Tolerance=±1%, componentlink1description=Datasheet, componentlink1url=https://industrial.panasonic.com/cdbs/www-data/pdf/RDA0000/AOA0000C304.pdf, componentlink2description="DigiKey Link", componentlink2url=https://www.digikey.com/en/products/detail/panasonic-electronic-components/ERJ-3EKF5112V/196391, Composition="Thick Film", Features="Automotive AEC-Q200", Height - Seated (Max)="0.022\ (0.55mm)", lastupdated="2024-02-09 20:42:22.343000", Lifecycle Status=Active, Minimum Order=1, Number of Terminations=2, Package / Case="0603 (1608 Metric)", packaging=TapeAndReel, Part Number=ERJ-3EKF5112V, Part Status=Active, partid=23146, price=0.01, Resistance="51.1 kOhms", series=ERJ-3EK, Size / Dimension="0.063\ L x 0.031\ W (1.60mm x 0.80mm)", Supplier 1=DigiKey
R15: library part ERJ-3EKF1023V, "RES SMD 102K OHM 1% 1/10W 0603", Device Package="0603 (1608 Metric)", manufacturer="Panasonic Electronic Components", Operating Temperature="-55Â°C ~ 155Â°C", Power (Watts)="0.1W 1/10W", Ratings=AEC-Q200, Supplier Device Package=0603, Supplier Part Number 1=P102KHCT-ND, Temperature Coefficient=Â±100ppm/Â°C, Tolerance=Â±1%, componentlink1description=Datasheet, componentlink1url=https://industrial.panasonic.com/cdbs/www-data/pdf/RDA0000/AOA0000C304.pdf, componentlink2description="DigiKey Link", componentlink2url=https://www.digikey.com/en/products/detail/panasonic-electronic-components/ERJ-3EKF1023V/196077, Composition="Thick Film", Features="Automotive AEC-Q200", Height - Seated (Max)="0.022\ (0.55mm)", lastupdated="2024-02-09 20:41:56.103000", Lifecycle Status=Active, Minimum Order=1, Number of Terminations=2, Package / Case="0603 (1608 Metric)", packaging=TapeAndReel, Part Number=ERJ-3EKF1023V, Part Status=Active, partid=26109, price=0.01, Resistance="102 kOhms", series=ERJ-3EK, Size / Dimension="0.063\ L x 0.031\ W (1.60mm x 0.80mm)", Supplier 1=DigiKey
R16: library part ERJ-PA3F2702V, "RES SMD 27K OHM 1% 1/3W 0603", Device Package="0603 (1608 Metric)", manufacturer="Panasonic Electronic Components", Operating Temperature="-55Â°C ~ 155Â°C", Power (Watts)="0.333W 1/3W", Ratings=AEC-Q200, Supplier Device Package=0603, Supplier Part Number 1=P27KBYCT-ND, Temperature Coefficient=Â±100ppm/Â°C, Tolerance=Â±1%, componentlink1description=Datasheet, componentlink1url=https://industrial.panasonic.com/cdbs/www-data/pdf/RDO0000/AOA0000C331.pdf, componentlink2description="DigiKey Link", componentlink2url=https://www.digikey.com/en/products/detail/panasonic-electronic-components/ERJ-PA3F2702V/5035900, Composition="Thick Film", Features="Automotive AEC-Q200 Pulse Withstanding", Height - Seated (Max)="0.022\ (0.55mm)", lastupdated="2024-02-09 20:42:50.500000", Lifecycle Status=Active, Minimum Order=1, Number of Terminations=2, Package / Case="0603 (1608 Metric)", packaging=TapeAndReel, Part Number=ERJ-PA3F2702V, Part Status=Active, partid=16622, price=0.01, Resistance="27 kOhms", series=ERJ-PA3, Size / Dimension="0.063\ L x 0.031\ W (1.60mm x 0.80mm)", Supplier 1=DigiKey
R17: library part ERJ-PA3F1503V, "RES SMD 150K OHM 1% 1/3W 0603", Device Package="0603 (1608 Metric)", manufacturer="Panasonic Electronic Components", Operating Temperature="-55°C ~ 155°C", Power (Watts)="0.333W 1/3W", Ratings=AEC-Q200, Supplier Device Package=0603, Supplier Part Number 1=P150KBYCT-ND, Temperature Coefficient=±100ppm/°C, Tolerance=±1%, componentlink1description=Datasheet, componentlink1url=https://industrial.panasonic.com/cdbs/www-data/pdf/RDO0000/AOA0000C331.pdf, componentlink2description="DigiKey Link", componentlink2url=https://www.digikey.com/en/products/detail/panasonic-electronic-components/ERJ-PA3F1503V/5035871, Composition="Thick Film", Features="Automotive AEC-Q200 Pulse Withstanding", Height - Seated (Max)="0.022\ (0.55mm)", lastupdated="2024-02-09 20:42:57.170000", Lifecycle Status=Active, Minimum Order=1, Number of Terminations=2, Package / Case="0603 (1608 Metric)", packaging=TapeAndReel, Part Number=ERJ-PA3F1503V, Part Status=Active, partid=14896, price=0.01, Resistance="150 kOhms", series=ERJ-PA3, Size / Dimension="0.063\ L x 0.031\ W (1.60mm x 0.80mm)", Supplier 1=DigiKey
R18 R19: library part ERJ-3EKF1872V, "RES SMD 18.7K OHM 1% 1/10W 0603", Device Package="0603 (1608 Metric)", manufacturer="Panasonic Electronic Components", Operating Temperature="-55°C ~ 155°C", Power (Watts)="0.1W 1/10W", Ratings=AEC-Q200, Supplier Device Package=0603, Supplier Part Number 1=P18.7KHCT-ND, Temperature Coefficient=±100ppm/°C, Tolerance=±1%, componentlink1description=Datasheet, componentlink1url=https://industrial.panasonic.com/cdbs/www-data/pdf/RDA0000/AOA0000C304.pdf, componentlink2description="DigiKey Link", componentlink2url=https://www.digikey.com/en/products/detail/panasonic-electronic-components/ERJ-3EKF1872V/196169, Composition="Thick Film", Features="Automotive AEC-Q200", Height - Seated (Max)="0.022\ (0.55mm)", lastupdated="2024-02-09 20:42:13.710000", Lifecycle Status=Active, Minimum Order=1, Number of Terminations=2, Package / Case="0603 (1608 Metric)", packaging=TapeAndReel, Part Number=ERJ-3EKF1872V, Part Status=Active, partid=24162, price=0.01, Resistance="18.7 kOhms", series=ERJ-3EK, Size / Dimension="0.063\ L x 0.031\ W (1.60mm x 0.80mm)", Supplier 1=DigiKey
R21 R37 R38 R63 R66: library part ERJ-PA3F1302V, "RES SMD 13K OHM 1% 1/3W 0603", Device Package="0603 (1608 Metric)", manufacturer="Panasonic Electronic Components", Operating Temperature="-55°C ~ 155°C", Power (Watts)="0.333W 1/3W", Ratings=AEC-Q200, Supplier Device Package=0603, Supplier Part Number 1=P13KBYCT-ND, Temperature Coefficient=±100ppm/°C, Tolerance=±1%, componentlink1description=Datasheet, componentlink1url=https://industrial.panasonic.com/cdbs/www-data/pdf/RDO0000/AOA0000C331.pdf, componentlink2description="DigiKey Link", componentlink2url=https://www.digikey.com/en/products/detail/panasonic-electronic-components/ERJ-PA3F1302V/5035865, Composition="Thick Film", Features="Automotive AEC-Q200 Pulse Withstanding", Height - Seated (Max)="0.022\ (0.55mm)", lastupdated="2024-02-09 20:42:19.180000", Lifecycle Status=Active, Minimum Order=1, Number of Terminations=2, Package / Case="0603 (1608 Metric)", packaging=TapeAndReel, Part Number=ERJ-PA3F1302V, Part Status=Active, partid=23525, price=0.01, Resistance="13 kOhms", series=ERJ-PA3, Size / Dimension="0.063\ L x 0.031\ W (1.60mm x 0.80mm)", Supplier 1=DigiKey
R23: library part RMCF0603FT3M40, "RES 3.4M OHM 1% 1/10W 0603", Device Package="0603 (1608 Metric)", manufacturer="Stackpole Electronics Inc", Operating Temperature="-55Â°C ~ 155Â°C", Power (Watts)="0.1W 1/10W", Ratings=AEC-Q200, Supplier Device Package=0603, Supplier Part Number 1=RMCF0603FT3M40CT-ND, Temperature Coefficient=Â±200ppm/Â°C, Tolerance=Â±1%, componentlink1description=Datasheet, componentlink1url=https://www.seielect.com/catalog/sei-rmcf_rmcp.pdf, componentlink2description="DigiKey Link", componentlink2url=https://www.digikey.com/en/products/detail/stackpole-electronics-inc/RMCF0603FT3M40/6266826, Composition="Thick Film", Features="Automotive AEC-Q200", Height - Seated (Max)="0.022\ (0.55mm)", lastupdated="2024-02-09 20:43:22.613000", Lifecycle Status=Active, Minimum Order=1, Number of Terminations=2, Package / Case="0603 (1608 Metric)", packaging=CutTape, Part Number=RMCF0603FT3M40, Part Status=Active, partid=8347, price=0.01, Resistance="3.4 MOhms", series=RMCF, Size / Dimension="0.061\ L x 0.031\ W (1.55mm x 0.80mm)", Supplier 1=DigiKey
R24: library part CRM2512-JW-510ELF, "RES SMD 51 OHM 5% 2W 2512", Device Package="2512 (6432 Metric)", manufacturer="Bourns Inc.", Operating Temperature="-55°C ~ 155°C", Power (Watts)=2W, Supplier Device Package=2512, Supplier Part Number 1=118-CRM2512-JW-510ELFCT-ND, Temperature Coefficient=±200ppm/°C, Tolerance=±5%, componentlink1description=Datasheet, componentlink1url=https://www.bourns.com/docs/Product-Datasheets/CRM.pdf, componentlink2description="DigiKey Link", componentlink2url=http://digikey.com/product-detail/en/bourns-inc/CRM2512-JW-510ELF/118-CRM2512-JW-510ELFCT-ND/10673704, Composition="Thick Film", Features="Current Sense", Height - Seated (Max)="0.031\" (0.80mm)", lastupdated="02/09/2020 01:18:04", Lifecycle Status=Active, Minimum Order=1, Number of Terminations=2, Package / Case="2512 (6432 Metric)", packaging=TapeAndReel, Part Number=CRM2512-JW-510ELF, Part Status=Active, partid=1920, price=0.06, Resistance="51 Ohms", series=CRM2512, Size / Dimension="0.248\" L x 0.122\" W (6.30mm x 3.10mm)", Supplier 1=DigiKey
R25 R28 R35: library part ERJ-PA3F1002V, "RES SMD 10K OHM 1% 1/3W 0603", Device Package="0603 (1608 Metric)", manufacturer="Panasonic Electronic Components", Operating Temperature="-55°C ~ 155°C", Power (Watts)="0.333W 1/3W", Ratings=AEC-Q200, Supplier Device Package=0603, Supplier Part Number 1=P10KBYCT-ND, Temperature Coefficient=±100ppm/°C, Tolerance=±1%, componentlink1description=Datasheet, componentlink1url=https://industrial.panasonic.com/cdbs/www-data/pdf/RDO0000/AOA0000C331.pdf, componentlink2description="DigiKey Link", componentlink2url=https://www.digikey.com/en/products/detail/panasonic-electronic-components/ERJ-PA3F1002V/5035849, Composition="Thick Film", Features="Automotive AEC-Q200 Pulse Withstanding", Height - Seated (Max)="0.022\ (0.55mm)", lastupdated="2024-02-09 20:42:57.847000", Lifecycle Status=Active, Minimum Order=1, Number of Terminations=2, Package / Case="0603 (1608 Metric)", packaging=TapeAndReel, Part Number=ERJ-PA3F1002V, Part Status=Active, partid=14698, price=0.01, Resistance="10 kOhms", series=ERJ-PA3, Size / Dimension="0.063\ L x 0.031\ W (1.60mm x 0.80mm)", Supplier 1=DigiKey
R26 R29 R34 R36 R42 R73: library part ERJ-PA3F1001V, "RES SMD 1K OHM 1% 1/3W 0603", Device Package="0603 (1608 Metric)", manufacturer="Panasonic Electronic Components", Operating Temperature="-55°C ~ 155°C", Power (Watts)="0.333W 1/3W", Ratings=AEC-Q200, Supplier Device Package=0603, Supplier Part Number 1=P1.0KBYCT-ND, Temperature Coefficient=±100ppm/°C, Tolerance=±1%, componentlink1description=Datasheet, componentlink1url=https://industrial.panasonic.com/cdbs/www-data/pdf/RDO0000/AOA0000C331.pdf, componentlink2description="DigiKey Link", componentlink2url=https://www.digikey.com/en/products/detail/panasonic-electronic-components/ERJ-PA3F1001V/5035848, Composition="Thick Film", Features="Automotive AEC-Q200 Pulse Withstanding", Height - Seated (Max)="0.022\ (0.55mm)", lastupdated="2024-02-09 20:42:57.220000", Lifecycle Status=Active, Minimum Order=1, Number of Terminations=2, Package / Case="0603 (1608 Metric)", packaging=TapeAndReel, Part Number=ERJ-PA3F1001V, Part Status=Active, partid=14885, price=0.01, Resistance="1 kOhms", series=ERJ-PA3, Size / Dimension="0.063\ L x 0.031\ W (1.60mm x 0.80mm)", Supplier 1=DigiKey
R27: library part CRM2512-FX-2R00ELF, "RES SMD 2 OHM 1% 2W 2512", Device Package="2512 (6432 Metric)", manufacturer="Bourns Inc.", Operating Temperature="-55°C ~ 155°C", Power (Watts)=2W, Supplier Device Package=2512, Supplier Part Number 1=CRM2512-FX-2R00ELFCT-ND, Temperature Coefficient=±100ppm/°C, Tolerance=±1%, componentlink1description=Datasheet, componentlink1url=https://www.bourns.com/docs/Product-Datasheets/CRM.pdf, componentlink2description="DigiKey Link", componentlink2url=http://digikey.com/product-detail/en/bourns-inc/CRM2512-FX-2R00ELF/CRM2512-FX-2R00ELFCT-ND/9677732, Composition="Thick Film", Features="Current Sense", Height - Seated (Max)="0.031\" (0.80mm)", lastupdated="02/09/2020 01:18:05", Lifecycle Status=Active, Minimum Order=1, Number of Terminations=2, Package / Case="2512 (6432 Metric)", packaging=TapeAndReel, Part Number=CRM2512-FX-2R00ELF, Part Status=Active, partid=1870, price=0.10, Resistance="2 Ohms", series=CRM2512, Size / Dimension="0.248\" L x 0.122\" W (6.30mm x 3.10mm)", Supplier 1=DigiKey
R30: library part TLRP3A20WR050FTE, "RES 0.05 OHM 1% 2W 2512", Device Package="2512 (6332 Metric)", manufacturer="TE Connectivity Passive Product", Operating Temperature="-55°C ~ 170°C", Power (Watts)=2W, Ratings=AEC-Q200, Supplier Device Package=2512, Supplier Part Number 1=1712-TLRP3A20WR050FTECT-ND, Temperature Coefficient=±75ppm/°C, Tolerance=±1%, componentlink1description=Datasheet, componentlink1url=https://www.te.com/commerce/DocumentDelivery/DDEController?Action=srchrtrv&DocNm=1773449-4&DocType=DS&DocLang=English, componentlink2description="DigiKey Link", componentlink2url=https://www.digikey.com/en/products/detail/te-connectivity-passive-product/TLRP3A20WR050FTE/14652078, Composition="Metal Element", Features="Anti-Sulfur, Automotive AEC-Q200, Current Sense", Height - Seated (Max)="0.035\" (0.90mm)", lastupdated="05/04/2026 21:05:23", Lifecycle Status=Active, Minimum Order=1, Number of Terminations=2, Package / Case="2512 (6332 Metric)", packaging=TapeAndReel, Part Number=TLRP3A20WR050FTE, Part Status=Active, partid=3243, price=0.14, Resistance="50 mOhms", series=TLRP, Size / Dimension="0.252\" L x 0.126\" W (6.40mm x 3.20mm)", Supplier 1=DigiKey
R31: library part ERJ-3EKF1912V, "RES SMD 19.1K OHM 1% 1/10W 0603", Device Package="0603 (1608 Metric)", manufacturer="Panasonic Electronic Components", Operating Temperature="-55°C ~ 155°C", Power (Watts)="0.1W 1/10W", Ratings=AEC-Q200, Supplier Device Package=0603, Supplier Part Number 1=P19.1KHCT-ND, Temperature Coefficient=±100ppm/°C, Tolerance=±1%, componentlink1description=Datasheet, componentlink1url=https://industrial.panasonic.com/cdbs/www-data/pdf/RDA0000/AOA0000C304.pdf, componentlink2description="DigiKey Link", componentlink2url=https://www.digikey.com/en/products/detail/panasonic-electronic-components/ERJ-3EKF1912V/196175, Composition="Thick Film", Features="Automotive AEC-Q200", Height - Seated (Max)="0.022\ (0.55mm)", lastupdated="2024-02-09 20:42:07.760000", Lifecycle Status=Active, Minimum Order=1, Number of Terminations=2, Package / Case="0603 (1608 Metric)", packaging=TapeAndReel, Part Number=ERJ-3EKF1912V, Part Status=Active, partid=24830, price=0.01, Resistance="19.1 kOhms", series=ERJ-3EK, Size / Dimension="0.063\ L x 0.031\ W (1.60mm x 0.80mm)", Supplier 1=DigiKey
R32: library part ERJ-3EKF2801V, "RES SMD 2.8K OHM 1% 1/10W 0603", Device Package="0603 (1608 Metric)", manufacturer="Panasonic Electronic Components", Operating Temperature="-55°C ~ 155°C", Power (Watts)="0.1W 1/10W", Ratings=AEC-Q200, Supplier Device Package=0603, Supplier Part Number 1=P2.80KHCT-ND, Temperature Coefficient=±100ppm/°C, Tolerance=±1%, componentlink1description=Datasheet, componentlink1url=https://industrial.panasonic.com/cdbs/www-data/pdf/RDA0000/AOA0000C304.pdf, componentlink2description="DigiKey Link", componentlink2url=https://www.digikey.com/en/products/detail/panasonic-electronic-components/ERJ-3EKF2801V/196198, Composition="Thick Film", Features="Automotive AEC-Q200", Height - Seated (Max)="0.022\ (0.55mm)", lastupdated="2024-02-09 20:42:22.487000", Lifecycle Status=Active, Minimum Order=1, Number of Terminations=2, Package / Case="0603 (1608 Metric)", packaging=TapeAndReel, Part Number=ERJ-3EKF2801V, Part Status=Active, partid=23129, price=0.01, Resistance="2.8 kOhms", series=ERJ-3EK, Size / Dimension="0.063\ L x 0.031\ W (1.60mm x 0.80mm)", Supplier 1=DigiKey
R33: library part ERJ-3EKF1432V, "RES SMD 14.3K OHM 1% 1/10W 0603", Device Package="0603 (1608 Metric)", manufacturer="Panasonic Electronic Components", Operating Temperature="-55°C ~ 155°C", Power (Watts)="0.1W 1/10W", Ratings=AEC-Q200, Supplier Device Package=0603, Supplier Part Number 1=P14.3KHCT-ND, Temperature Coefficient=±100ppm/°C, Tolerance=±1%, componentlink1description=Datasheet, componentlink1url=https://industrial.panasonic.com/cdbs/www-data/pdf/RDA0000/AOA0000C304.pdf, componentlink2description="DigiKey Link", componentlink2url=https://www.digikey.com/en/products/detail/panasonic-electronic-components/ERJ-3EKF1432V/97438, Composition="Thick Film", Features="Automotive AEC-Q200", Height - Seated (Max)="0.022\ (0.55mm)", lastupdated="2024-02-09 20:41:56.467000", Lifecycle Status=Active, Minimum Order=1, Number of Terminations=2, Package / Case="0603 (1608 Metric)", packaging=TapeAndReel, Part Number=ERJ-3EKF1432V, Part Status=Active, partid=26065, price=0.01, Resistance="14.3 kOhms", series=ERJ-3EK, Size / Dimension="0.063\ L x 0.031\ W (1.60mm x 0.80mm)", Supplier 1=DigiKey
R39: library part ERJ-3EKF1473V, "RES SMD 147K OHM 1% 1/10W 0603", Device Package="0603 (1608 Metric)", manufacturer="Panasonic Electronic Components", Operating Temperature="-55°C ~ 155°C", Power (Watts)="0.1W 1/10W", Ratings=AEC-Q200, Supplier Device Package=0603, Supplier Part Number 1=P147KHCT-ND, Temperature Coefficient=±100ppm/°C, Tolerance=±1%, componentlink1description=Datasheet, componentlink1url=https://industrial.panasonic.com/cdbs/www-data/pdf/RDA0000/AOA0000C304.pdf, componentlink2description="DigiKey Link", componentlink2url=https://www.digikey.com/en/products/detail/panasonic-electronic-components/ERJ-3EKF1473V/196131, Composition="Thick Film", Features="Automotive AEC-Q200", Height - Seated (Max)="0.022\ (0.55mm)", lastupdated="2024-02-09 20:42:14.433000", Lifecycle Status=Active, Minimum Order=1, Number of Terminations=2, Package / Case="0603 (1608 Metric)", packaging=TapeAndReel, Part Number=ERJ-3EKF1473V, Part Status=Active, partid=24063, price=0.01, Resistance="147 kOhms", series=ERJ-3EK, Size / Dimension="0.063\ L x 0.031\ W (1.60mm x 0.80mm)", Supplier 1=DigiKey